# Altium PCB RS_485_MySensor.PcbDoc
Units mil, origin at the board's own origin, x right, y up, seen from the top; angles counter-clockwise.
Board outline 2845 x 1811.02 mil, 2 copper layers (Top Layer, Bottom Layer); 42 components, 39 nets, 157 pads, 49 vias.
Unrouted connection lines stored in the file: 2.
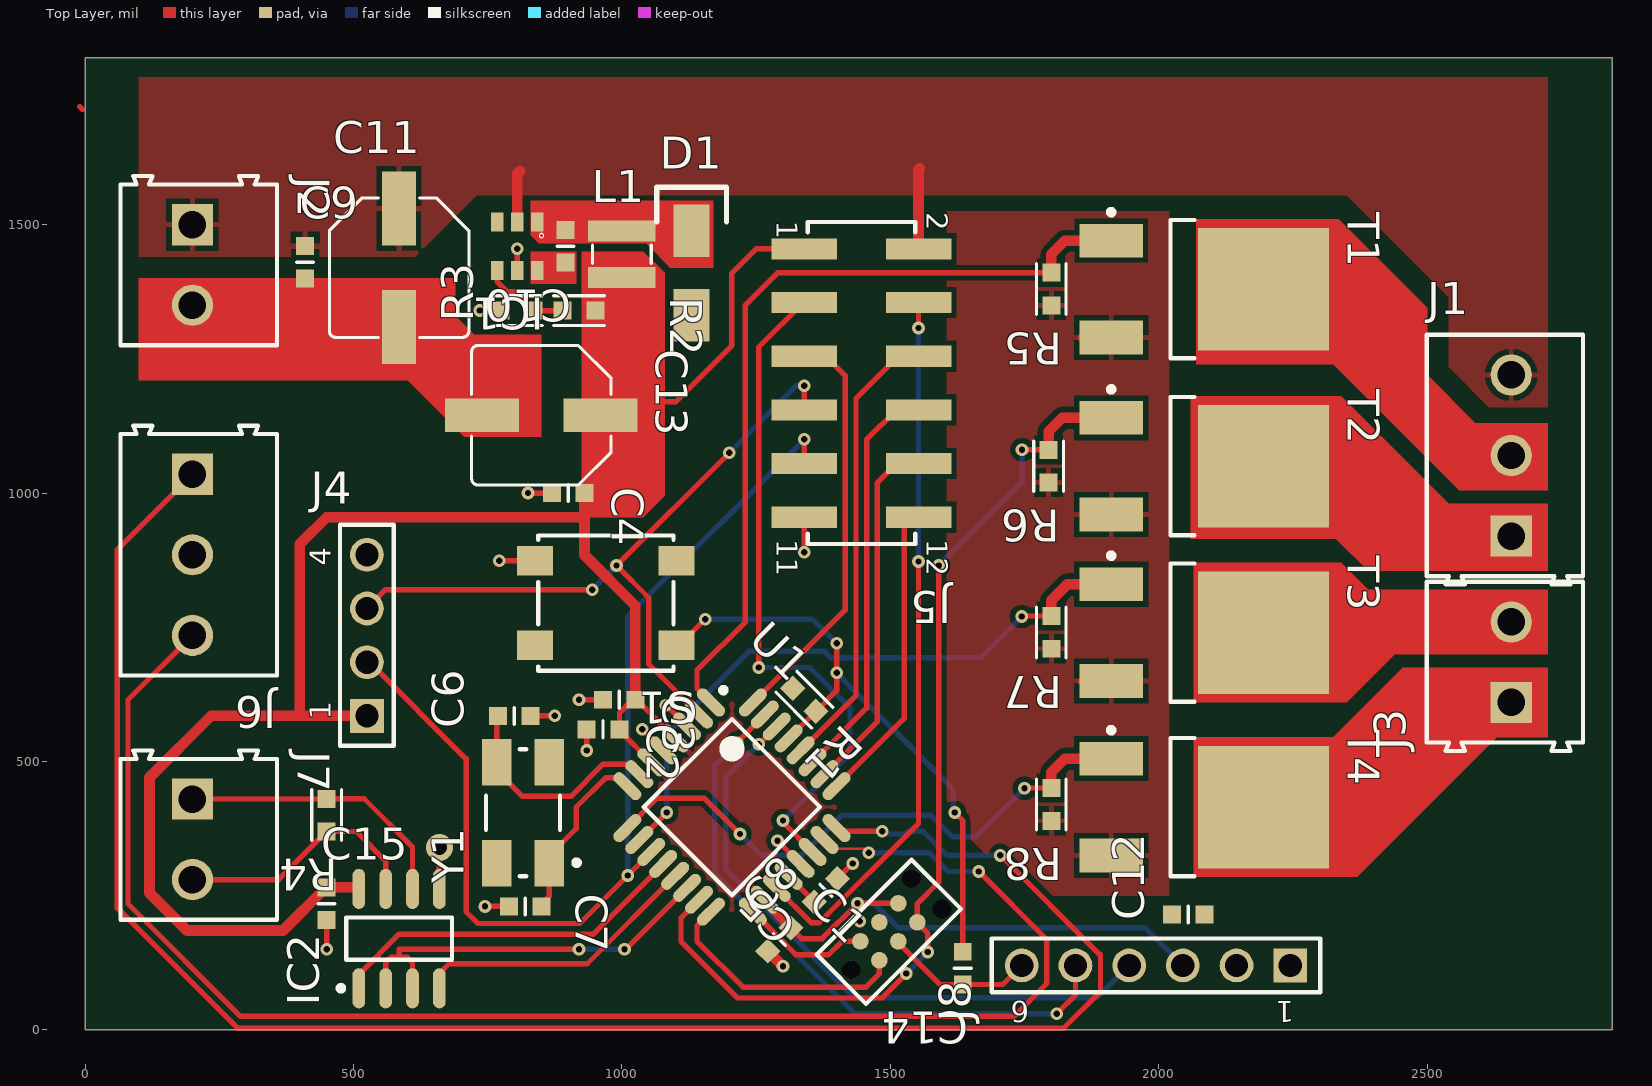
[diagram p0: Top Layer view]
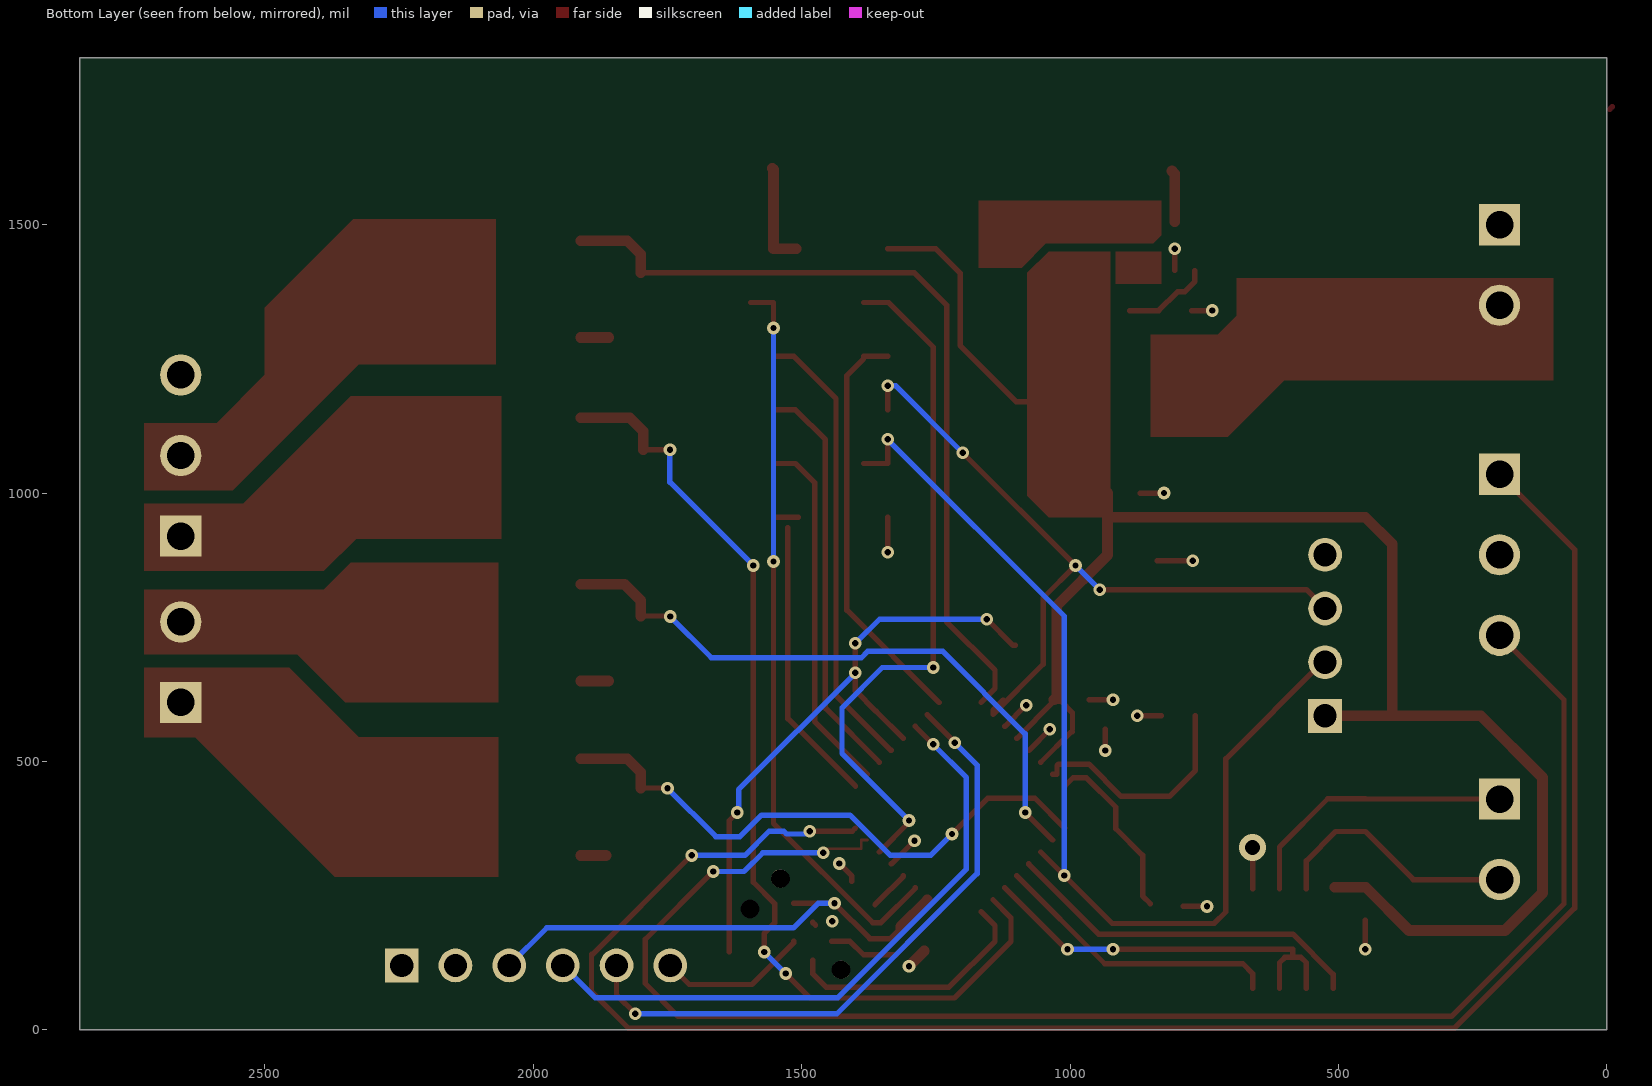
[diagram p1: Bottom Layer view, seen from below]
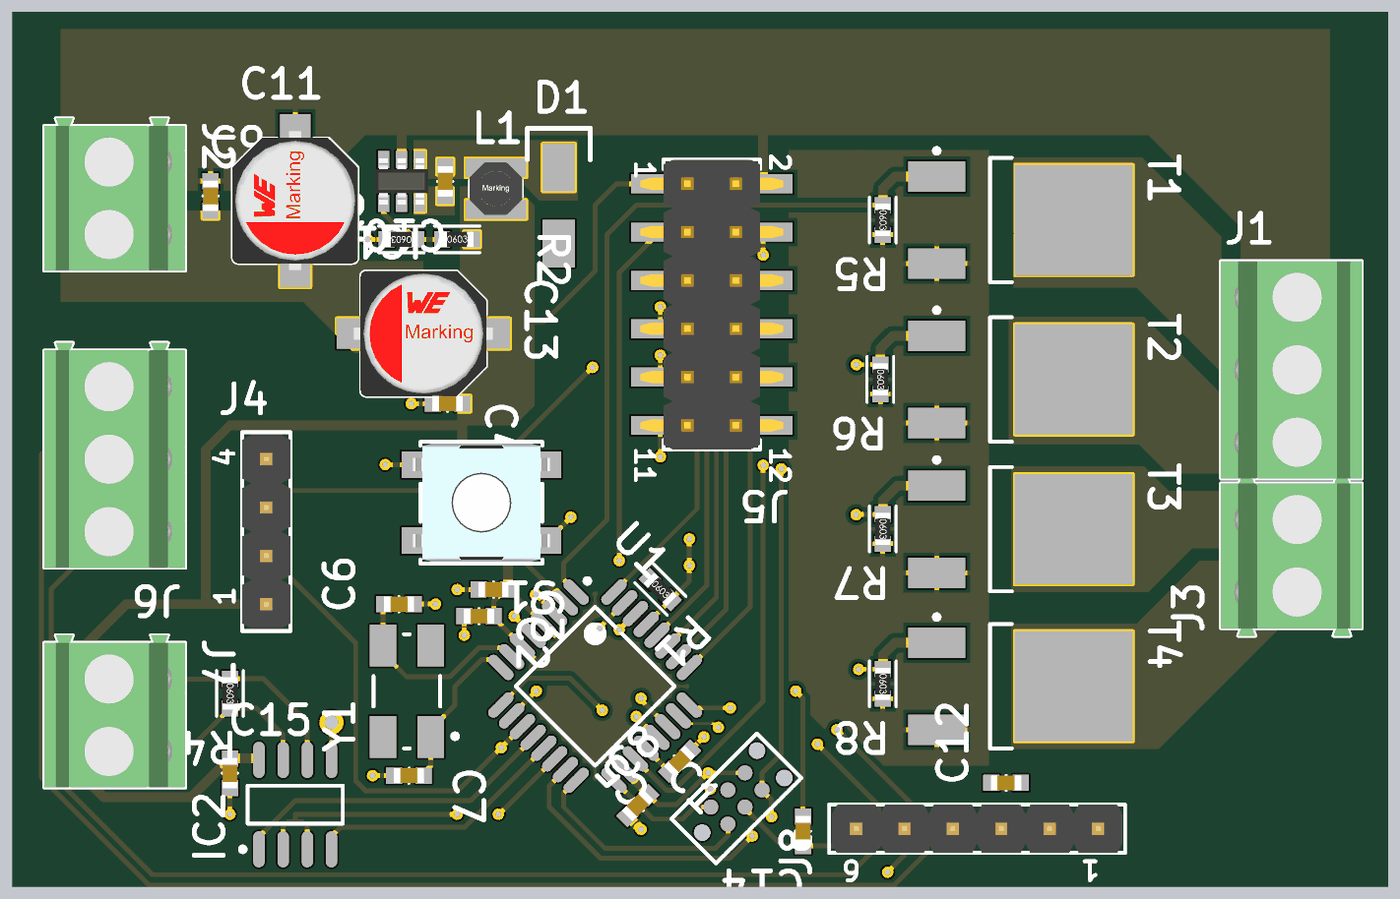
[diagram p2: 3D render of the assembled board from above, using the file's embedded part models]

## Layer stack, top to bottom
Top Solder: solder mask 0.4, Solder Resist, Dk 3.5
Top Layer: signal copper 1.4
Dielectric 1: dielectric 12.6, FR-4, Dk 4.8
Bottom Layer: signal copper 1.4
Bottom Solder: solder mask 0.4, Solder Resist, Dk 3.5

## Board outline
0,0 0,1811.02 2845,1811.02 2845,0

## Design rules (kind name [scope] priority, off if disabled: settings)
Clearance [All] p1: gap=10 ignorepadtopadclearanceinfootprint=FALSE except(0: Arc-Hole Track-Hole SMDPad-Hole THPad-Hole Via-Hole Fill-Hole Poly-Hole Region-Hole Text-Hole)
PolygonConnect [All] p1: connectstyle=Relief reliefconductorwidth=10 reliefentries=4 polygonreliefangle="90 Angle" airgapwidth=10
RoutingVias [All] p1: holewidth=28 width=50 viastyle="Through Hole" minholewidth=28 minwidth=50 maxholewidth=28 maxwidth=50
SolderMaskExpansion [All] p1: expansion=4
Width [All] p1: maxlimit=1000 minlimit=5 preferedwidth=10 minimp=50.000000 maximp=50.000000 favimp=50.000000
30 further rules are at their usual default settings.

## Classes and differential pairs
component class RS485_RGB_Atmega328: C1 C2 C3 C4 C5 C6 C7 C8 C14 J8 R1 S1 SW1 U1 Y1
component class RS485_RGB_Power: C9 C10 C11 C12 C13 C15 D1 IC1 IC2 L1 R2 R3 R5 R6 R7 R8 R? T1 T2 T3 T4
component class RS485_RGB_Connector: J4 J5 J6 R4

## Components (designator, comment, footprint, x,y, rotation, side; value= is the part's Value field where it differs from the comment)
C1 "4.7µF" SMD-0603C 1293.42,168.42 r315 top
C2 "1µF" SMD-0603C 965,560 r270 top
C3 "0.10µF" SMD-0603C 995,615 r270 top
C4 "0.10µF" SMD-0603C 900,1000 r270 top
C5 "0.10µF" SMD-0603C 1380,260 r135 top
C6 "22pF" SMD-0603C 799.49,585 r90 top
C7 "22pF" SMD-0603C 820,230 r270 top
C8 "ICSP" TC2030-MCP-NL 1426.61,111.97 r45 top
C9 "0.10µF" SMD-0603C 410,1430 r0 top
C10 "0.022µF" SMD-0603C 895,1460 r180 top
C11 "865080543009" WCAP-ASLI_6.3x5.5 585,1420 r90 top
C12 "22µF" SMD-0603C 2055,215 r90 top
C13 "865080543009" WCAP-ASLI_6.3x5.5 850,1145 r0 top
C14 "0.10µF" SMD-0603C 1635,115 r180 top
C15 "0.10µF" SMD-0603C 450,235 r0 top
D1 "B240A" B240A 1130,1410 r90 top
IC1 "ACT4088" SOT23-6 805,1460 r180 top
IC2 "MAX485" D008_L 585,170 r90 top
J1 "691214310003" 691214310003 2645,1070 r90 top
J2 "691214310002" 691214310002 211.81,1425 r270 top
J3 "691214310002" 691214310002 2645,685 r90 top
J4 "2.54 mm_THT_Vertical_4 pin" 61300411121 525,735 r90 top
J5 "2.54 mm_SMD_Vertical_12 pin" 61001221121 1446.3,1205 r270 top
J6 "691214310003" 691214310003 211.81,885 r270 top
J7 "691214310002" 691214310002 211.81,355 r270 top
J8 "2.54 mm_THT_Vertical_6 pin" 61300611121 1995,120 r180 top
L1 "744029004" WE-TPC_2813 1000,1445 r0 top
R1 "1k" SMD-0603-RES 1340,615 r225 top
R2 "47k" SMD-0603-RES 920,1340 r270 top
R3 "10k" SMD-0603-RES 804.49,1340 r90 top
R4 "120" SMD-0603-RES 450,400 r180 top
R5 "10k" SMD-0603-RES 1800,1380 r180 top
R6 "10k" SMD-0603-RES 1795,1050 r180 top
R7 "10k" SMD-0603-RES 1800,740.51 r180 top
R8 "10k" SMD-0603-RES 1800,420 r180 top
S1 "430453025836" 430453025836 970,795 r180 top
T1 "IRLR7833" ONSC-DPAK-3-369C-01_V 2084.76,1380 r0 top
T2 "IRLR7833" ONSC-DPAK-3-369C-01_V 2084.76,1050 r0 top
T3 "IRLR7833" ONSC-DPAK-3-369C-01_V 2084.76,740 r0 top
T4 "IRLR7833" ONSC-DPAK-3-369C-01_V 2084.76,415 r0 top
U1 "ATmega328-AU" 32A_N 1205,415 r315 top
Y1 "2SMX" 2SMX 815.79,404.49 r90 top

## Footprints (in the part's own frame and the unit in brackets; to place one, negate y for a bottom-side part, rotate by r counter-clockwise, add the part's x,y. Pads: shape width x height; smd on the part's side, far side on the other; paste and mask are expansions set on the pad)
2SMX [mm] "Surface Mount Quartz Crystal; Body 6.0 x 3.5 mm (LxW)"
  rect 2.2x1.4 smd: 1(-2.4,-1.25) 2(2.4,-1.25) 3(2.4,1.25) 4(-2.4,1.25)
  silkscreen extent -3,-2.66 3,1.75
32A_N [mm] "Thin QFP, 32-Leads, Body 7x7mm, Pitch 0.8mm, IPC Medium Density"
  oval 1.65x0.55 smd: 1(-4.2,2.8) 2(-4.2,2) 3(-4.2,1.2) 4(-4.2,0.4) 5(-4.2,-0.4) 6(-4.2,-1.2) 7(-4.2,-2) 8(-4.2,-2.8) 17(4.2,-2.8) 18(4.2,-2) 19(4.2,-1.2) 20(4.2,-0.4) 21(4.2,0.4) 22(4.2,1.2) 23(4.2,2) 24(4.2,2.8)
  oval 0.55x1.65 smd: 9(-2.8,-4.2) 10(-2,-4.2) 11(-1.2,-4.2) 12(-0.4,-4.2) 13(0.4,-4.2) 14(1.2,-4.2) 15(2,-4.2) 16(2.8,-4.2) 25(2.8,4.2) 26(2,4.2) 27(1.2,4.2) 28(0.4,4.2) 29(-0.4,4.2) 30(-1.2,4.2) 31(-2,4.2) 32(-2.8,4.2)
  silkscreen extent -4.32,-2.95 2.95,3.75, body extent -3.5,-3.5 3.5,3.5, height 1.2
61001221121 [mm] "Pin Header, pitch 2.54 mm, SMD, Vertical, dual row, 12p"
  rect 1x3.1 smd: 1(-6.35,-2.7) 2(-6.35,2.7) 3(-3.81,-2.7) 4(-3.81,2.7) 5(-1.27,-2.7) 6(-1.27,2.7) 7(1.27,-2.7) 8(1.27,2.7) 9(3.81,-2.7) 10(3.81,2.7) 11(6.35,-2.7) 12(6.35,2.7)
  silkscreen extent -7.62,-2.54 7.62,2.54, body extent -7.62,-3.75 7.62,3.75, height 9.62
61300411121 [mm] "Pin Header, pitch 2.54 mm, THT, Vertical, single row, 4p"
  rect 1.6x1.6 hole 1.1: 1(-3.81,0)
  round 1.6 hole 1.1: 2(-1.27,0) 3(1.27,0) 4(3.81,0)
  silkscreen extent -5.23,-1.27 5.23,1.27, body extent -5.08,-1.27 5.08,1.27, height 8.57
61300611121 [mm] "Pin Header, pitch 2.54 mm, THT, Vertical, single row, 6p"
  rect 1.6x1.6 hole 1.1: 1(-6.35,0)
  round 1.6 hole 1.1: 2(-3.81,0) 3(-1.27,0) 4(1.27,0) 5(3.81,0) 6(6.35,0)
  silkscreen extent -7.77,-1.27 7.77,1.27, body extent -7.62,-1.27 7.62,1.27, height 8.57
430453025836 [mm] "SMD Tact Switch, body 6x6mm"
  rect 1.7x1.4 smd: 1(-3.35,2) 2(3.35,2) 3(-3.35,-2) 4(3.35,-2)
  silkscreen extent -3.2,-3.2 3.2,3.2, body extent -3.6,-3.1 3.6,3.1, height 2.5
691214310002 [mm] "3,81mm - Horizontal wire entry - Rising cage clamp - 02p"
  rect 1.95x1.95 hole 1.3: 1(-1.905,-0.3)
  round 1.95 hole 1.3: 2(1.905,-0.3)
  silkscreen extent -4.2,-3.7 3.8,3.7, body extent -4.21,-3.7 3.81,3.7, height 8.55
691214310003 [mm] "3,81mm - Horizontal wire entry - Rising cage clamp - 03p"
  rect 1.95x1.95 hole 1.3: 1(-3.81,-0.3)
  round 1.95 hole 1.3: 2(0,-0.3) 3(3.81,-0.3)
  silkscreen extent -6.11,-3.7 5.71,3.7, body extent -6.12,-3.7 5.71,3.7, height 8.55
B240A [mm]
  rect 2.5x1.7 smd: A(-2,0) K(2,0)
  silkscreen extent 2.41,-1.65 4.06,1.65
D008_L [mm] "8-Pin Small Outline Integrated Circuit 1.27 mm Pitch, IPC High Density"
  oval 1.9x0.6 smd: 1(-2.35,1.905) 2(-2.35,0.635) 3(-2.35,-0.635) 4(-2.35,-1.905) 5(2.35,-1.905) 6(2.35,-0.635) 7(2.35,0.635) 8(2.35,1.905)
  silkscreen extent -2.47,-2.5 1,2.88, body extent -1.95,-2.45 1.95,2.45, height 1.75
ONSC-DPAK-3-369C-01_V [mm] "DPAK, 3-Leads, Body 6.54x6.095mm, Pitch 2.29mm"
  rect 3x1.6 smd: 1(-4.4,2.29) 3(-4.4,-2.29)
  rect 6.2x5.8 smd: 4(2.8,0)
  silkscreen extent -4.52,-3.27 -0.45,3.76, body extent -1.6,-3.27 4.49,3.27, height 2.38
SMD-0603-RES [mm]
  rect 0.85x0.85 smd: 1(0,0.775) 2(0,-0.775)
  silkscreen extent -0.7,-1.2 0.7,1.2, body extent -0.4,-0.85 0.4,0.85, height 0.56
SMD-0603C [mm]
  rect 0.85x0.85 smd: 1(0,0.775) 2(0,-0.775)
  silkscreen extent -0.4,0 0.4,0, body extent -0.4,-0.8 0.4,0.8, height 0.9
SOT23-6 [mm]
  rect 0.6x0.9 smd: 1(-0.95,-1.15) 2(0,-1.15) 3(0.95,-1.15) 4(0.95,1.15) 5(0,1.15) 6(-0.95,1.15)
  silkscreen extent -1.25,-0.6 -1.05,-0.4, body extent -1.4,-1.21 1.4,1.21, height 1.09
TC2030-MCP-NL [mil]
  round 31 smd: 1(50,-25) 2(50,25) 3(100,-25) 4(100,25) 5(150,-25) 6(150,25)
  round 34 hole 35 unplated: A(0,0) B(200,40) C(200,-40)
  silkscreen extent -25,-65 225,65
WCAP-ASLI_6.3x5.5 [mm] "Aluminium Electrolytic V-Chip SMT Capacitors, §¶6.3x5.5mm"
  rect 3.5x1.6 smd: 1(2.8,0) 2(-2.8,0)
  silkscreen extent -3.3,-3.3 3.3,3.3, body extent -3.65,-3.3 3.65,3.3, height 5.5
WE-TPC_2813 [mm] "Power Inductor, SMD, 2-Leads, body 2.8x2.8mm"
  rect 3.2x1 smd: 1(0,1.1) 2(0,-1.1)
  silkscreen extent -1.39,-0.43 1.39,0.43, body extent -1.39,-1.39 1.39,1.39, height 1.2

## Part data
C1: library part GRM188C80G475KE19D, "CAP CER 4.7UF 4V X6S 0603"
C2: library part GRM185C81A105KE36D, "CAP CER 1UF 10V X6S 0603"
C3 C4 C5 C9 C14 C15: library part GCJ188R72A104KA01D, "CAP CER 0.1UF 100V X7R 0603"
C6 C7: library part GCM1885C1H220JA16D, "CAP CER 22PF 50V NP0 0603"
C10: library part GCJ188R71H223KA01D, "CAP CER 0.022UF 50V X7R 0603"
C11 C13: "WCAP-ASLI Aluminum Electrolytic Capacitors, size ?6.3x5.5mm, 35V DC, 47uF"
C12: library part GRM186R60G226ME15D, "CAP CER 22UF 4V X5R 0603"
D1: "Shottkydiode"
J1 J6: "Serie 2143 - 3.81 mm Horizontal Cable Entry with Rising Cage Clamp WR-TBL, 3 pin"
J2 J3 J7: "Serie 2143 - 3.81 mm Horizontal Cable Entry with Rising Cage Clamp WR-TBL, 2 pin"
J4: library part 61300411121, "Pin Header WR-PHD, pitch 2.54 mm, THT, Vertical, single row, 4 pin"
J5: library part 61001221121, "Pin Header WR-PHD, pitch 2.54 mm, SMD, Vertical, dual row, 12 pin"
J8: library part 61300611121, "Pin Header WR-PHD, pitch 2.54 mm, THT, Vertical, single row, 6 pin"
L1: "WE-TPC SMD Shielded Tiny Power Inductor, size 2813, 1A, 170mO, 4.7uH"
R1: library part ERJ-3EKF1001V, "RES SMD 1K OHM 1% 1/10W 0603"
R2: library part ERJ-3EKF4702V, "RES SMD 47K OHM 1% 1/10W 0603"
R3 R5 R6 R7 R8: library part ERJ-3EKF1002V, "RES SMD 10K OHM 1% 1/10W 0603"
R4: library part ERJ-3EKF1200V, "RES SMD 120 OHM 1% 1/10W 0603"
S1: "6x6mm SMD J-Bend washable WS-TASV, height 2.5 mm, 360 gf"
T1 T2 T3 T4: "N-Channel MOSFET"
U1: "8-bit AVR Microcontroller, 32KB Flash, 1KB EEPROM, 2KB SRAM, 32-pin TQFP, Industrial Grade (-40°C to 85°C)"
Y1: "Surface Mount Quartz Crystal"

## Via types
v1: diameter 23.62, hole 11.81, Top Layer to Bottom Layer, 48 vias
v2: diameter 50, hole 28, Top Layer to Bottom Layer, 1 vias

## Nets (pads, with @x,y where several pads share a name; then routed paths per layer and width w, separated by ;. In a path a pad name is that pad's centre, name@x,y a point inside that pad or via, vN(x,y) a via of type N, cw(c..) or ccw(c..) an arc to the next point about the centre after c; other vN are vias at no path point)
+5V: C1.1 C2.1 C3.1 C4.1 C8.6 C12.1 C13.1 C15.1 IC2.8 J4.1 J5.1 J8.3 L1.2 R1.2 R2.1 U1.4 U1.6 U1.18 | length 4180.1
  Top Layer w10: IC2.8@507.01,265.51 IC2.8 ; C13.1@995.24,1170 1100,1170 1205,1275 1205,1410 1250,1455 J5.1 ; C2.1@995.51,555 998.19,555 U1.6 ; C2.1 995.51,590.51 1017.27,612.27 C3.1@1030,612.27 ; C3.1@1030,615 C3.1@1030,612.27 ; U1.4 C3.1@1030,612.27 ; C1.1 1335,170 1373.16,170 v1(1438.87,235.71) C8.6
  Top Layer w20: IC2.8@507.01,265.51 C15.1 449.27,265.51 368.76,185 190,185 120,255 120,470 235,585 400,585 ; J4.1 400,585 ; C4.1 930.51,955.51 ; C3.1@1030,615 1025,620 1025,790 930.51,884.49 930.51,955.51 ; U1.18 1266.25,241.45 1315,192.7 C1.1 ; 400,585 400,905 450,955 930,955 930.51,955.51
  Bottom Layer w10: v1(1438.87,235.71) 1469.54,235.71 1515.25,190 1975,190 J8.3
GND: C1.2 C2.2 C3.2 C4.2 C5.2 C6.2 C7.2 C8.4 C9.2 C11.2 C12.2 C13.2 C15.2 D1.A IC1.5 IC2.5 J2.2 J4.4 J5.11 J6.2 J8.1 J8.2 R3.1 R5.1 R6.1 R7.1 R8.1 S1.4 T1.3 T2.3 T3.3 T4.3 U1.3 U1.5 U1.21 | length 984.6
  Top Layer w10: v1(450,150) C15.2 ; IC2.5 v2(660,340) ; v1(735,1340) R3.1 ; v1@740,230 v1(745,230) C7.2 ; v1(771.26,873.74) S1.4 ; IC1.5 v1(805,1455) ; v1(825,1000) C4.2 ; C6.2 v1(875,585) v1@879.84,585 ; v1(920,615) C3.2 ; v1(934.49,520.51) C2.2 ; v1(1037.73,560) U1.5 ; v1(1081.81,605) U1.3 ; v1(1290,352.27) U1.21 U1.21@1333.7,309.21 ; v1(1340,890) J5.11 ; C5.2@1406.58,276.58 1406.58,286.58 v1(1430,310) ; C8.4@1474.29,195 C8.4
  Top Layer w20: C1.2 v1(1300,118.7) ; T1.3@1859.65,1289.84 T1.3 ; T3.3@1860.16,649.84 T3.3 ; T4.3@1864.65,324.84 T4.3
  other v1: 1443.39,202.31
NetC5_1: C5.1 U1.20 | length 75.3
  Top Layer w10: U1.20 1310.79,286.06 C5.1 C5.1@1363.42,233.42
NetC6_1: C6.1 U1.7 Y1.3 | length 429.6
  Top Layer w10: C6.1@766.57,585 Y1.3 766.57,483.43 815,435 905,435 965.11,495.11 1021.55,495.11 1024.38,492.28 1024.38,476.25 U1.7
NetC7_1: C7.1 U1.8 Y1.1 | length 331.3
  Top Layer w10: C7.1@850.51,235 865,249.49 Y1.1 865,325 915,375 915,415 970,470 994.1,470 U1.8
NetC8_1: C8.1 U1.16 | length 476.4
  Top Layer w10: U1.16 1140,194.1 1140,165 1225.53,79.47 1454.47,79.47 1479.64,104.64 C8.1
NetC8_2: C8.2 U1.17 | length 243.9
  Top Layer w10: U1.17 1324.1,140 1385,140 1410,165 C8.2
NetC8_3: C8.3 C14.1 J8.6 | length 279.8
  Top Layer w10: C8.3 1515,162.08 1592.6,84.49 C14.1 1709.49,84.49 J8.6
NetC8_5: C8.5 R6.2 T2.1 U1.15 | length 1865.9
  Top Layer w10: U1.15 1110,208.64 1110,165 1215.53,59.47 1484.47,59.47 v1(1530,105) ; v1(1570,145) 1570,179.64 1550.36,199.29 1550.36,235.36 1590,275 v1(1590,865) ; v1(1745.51,1080.51) R6.2
  Top Layer w20: R6.2 1795,1115 1820.16,1140.16 T2.1
  Bottom Layer w10: v1(1530,105) v1(1570,145) ; v1(1590,865) 1745.51,1020.51 v1(1745.51,1080.51)
NetC10_1: C10.1 IC1.6
NetC10_2: C10.2 D1.K IC1.1 L1.1
NetC14_2: C14.2 R1.1 S1.1 U1.29 | length 1162.3
  Top Layer w10: S1.1 1106.26,716.26 v1(1155,765) ; U1.29 1361.15,593.42 R1.1 1400,631.85 v1(1400,665) v1(1400,720) ; v1(1620,405) 1635,390 C14.2
  Bottom Layer w10: v1(1155,765) 1355,765 v1@1395,725 ; v1(1400,665) 1617.5,447.5 v1@1617.5,402.5
NetIC1_4: IC1.4 R2.2 R3.2 | length 164.9
  Top Layer w10: IC1.4 767.6,1394.13 786.73,1375 800,1375 R3.2 R2.2
NetIC2_1: IC2.1 U1.12 | length 678.7
  Top Layer w10: IC2.1 510,103.28 584.98,178.27 947.1,178.27 1076.94,308.1 U1.12
NetIC2_2: IC2.2 IC2.3 U1.14 | length 752.3
  Top Layer w10: IC2.2 560,125 570,135 585,135 ; IC2.3 610,125 600,135 585,135 ; v1(920,150) 585,150 585,135 ; v1(1005,150) 1006.81,150 U1.14
  Bottom Layer w10: v1(920,150) v1(1005,150)
NetIC2_4: IC2.4 U1.13 | length 542.1
  Top Layer w10: IC2.4 660,105 678.19,123.19 935.46,123.19 U1.13
NetIC2_6: IC2.6 J7.1 R4.2 | length 525.5
  Top Layer w10: J7.1 449.49,430 R4.2 520,430.51 610,340.51 IC2.6
NetIC2_7: IC2.7 J7.2 R4.1 | length 472.1
  Top Layer w10: J7.2 360.51,280 R4.1 505.51,369.49 560,315 IC2.7
NetJ1_1: J1.1 T2.4
NetJ1_2: J1.2 T1.4 | length 5
  Top Layer w10: T1.4 T1.4@2200,1380
NetJ3_1: J3.1 T4.4
NetJ3_2: J3.2 T3.4
NetJ4_2: J4.2 J5.9 U1.11 | length 1995.9
  Top Layer w10: J4.2 530,685 710,505 710,220 731.73,198.27 921.45,198.27 v1(1010.92,287.73) U1.11 ; v1(1340,1100) J5.9 J5.9@1385,1055
  Bottom Layer w10: v1@1008.19,285 v1(1010.92,287.73) 1010.92,770.92 v1(1340,1100)
NetJ4_3: J4.3 J5.7 U1.2 | length 1407.7
  Top Layer w10: J4.3 560,820 v1(945,820) ; 1124.89,614.49 1143.75,595.62 U1.2 1050,681.36 1050,805 v1(990,865) v1(1200,1075) ; J5.7 v1(1340,1200)
  Bottom Layer w10: v1(945,820) v1(990,865) ; v1(1200,1075) 1325,1200 v1(1340,1200)
NetJ5_3: J5.3 U1.22 | length 1305.6
  Top Layer w10: v1(1255,675) 1255,1271.92 1338.08,1355 J5.3 J5.3@1385,1355 ; v1(1300,390) 1300,386.81 U1.22
  Bottom Layer w10: v1(1255,675) 1350,675 1425,600 1425,515 v1(1300,390)
NetJ5_4: J5.4 U1.19 | length 1381
  Top Layer w10: U1.19 1288.52,263.46 1352.21,199.76 1367.68,199.76 1552.6,384.68 v1(1552.6,872.4) ; v1(1552.6,1307.4) J5.4 J5.4@1595,1355
  Bottom Layer w10: v1(1552.6,872.4) v1(1552.6,1307.4)
NetJ5_5: J5.5 U1.32 | length 774.2
  Top Layer w10: U1.32 1416.02,781.92 1416.02,1218.98 1385,1250 1385,1255 J5.5
NetJ5_6: J5.6 U1.28 | length 847.6
  Top Layer w10: U1.28 1333.81,520.79 1436.02,623 1436.02,1176.02 1515,1255 J5.6
NetJ5_8: J5.8 U1.27 | length 762.2
  Top Layer w10: U1.27 1456.02,599.21 1456.02,1099.45 1511.57,1155 J5.8
NetJ5_10: J5.10 U1.26 | length 675.3
  Top Layer w10: U1.26 1476.02,574.67 1476.02,1019.45 1511.57,1055 J5.10
NetJ5_12: J5.12 U1.25 | length 580
  Top Layer w10: U1.25 1525.79,579.89 J5.12@1525.79,935.79 ; J5.12@1506.57,955 J5.12
NetJ6_1: J6.1 U1.24 | length 3481.1
  Top Layer w10: J6.1 60,895 60,226.72 283.53,3.19 1823.19,3.19 1891.5,71.5 1891.5,140.76 1890,140.76 1705.76,325 v1(1705,325) ; U1.24 1405.9,370 v1(1485,370)
  Bottom Layer w10: v1(1485,370) 1490,365 1528.28,365 1533.28,370 1560.76,370 1605.76,325 v1(1705,325)
NetJ6_3: J6.3 U1.23 | length 2955.8
  Top Layer w5: U1.23 1389.15,353.75 1389.15,337.39 1452.61,337.39 v1(1460,330)
  Top Layer w10: J6.3 80,615 80,235 289.92,25.08 1730.08,25.08 1791.5,86.5 1791.5,168.5 v1(1665,295)
  Bottom Layer w10: v1(1460,330) 1572.47,330 1607.47,295 v1(1665,295)
NetJ8_4: J8.4 U1.30 | length 1181.2
  Top Layer w10: v1(1255,531.81) U1.30
  Bottom Layer w10: v1(1255,531.81) 1193.19,470 1193.19,299.43 1432.62,60 1885,60 J8.4
NetJ8_5: J8.5 U1.31 | length 1184.5
  Top Layer w10: v1(1215,535) 1215,536.36 U1.31 ; v1(1810,30) 1845,65 J8.5
  Bottom Layer w10: v1(1215,535) 1173.19,493.19 1173.19,291.14 1434.33,30 v1(1810,30)
NetR5_2: R5.2 T1.1 U1.1 | length 1539.7
  Top Layer w10: U1.1 1140,635.9 1140,670 1230,760 1230,1350 1290.51,1410.51 R5.2
  Top Layer w20: R5.2 1800,1445 1825.16,1470.16 T1.1
NetR7_2: R7.2 T3.1 U1.10 | length 1187.6
  Top Layer w10: U1.10 v1(1083.64,405) ; v1@1746.02,771.02 R7.2
  Top Layer w20: R7.2 1800,800 1830.16,830.16 T3.1
  Bottom Layer w10: v1(1083.64,405) 1083.64,551.56 1237.08,705 1377.08,705 1388.89,693.19 1668.19,693.19 v1(1745,770)
NetR8_2: R8.2 T4.1 U1.9 | length 1097.7
  Top Layer w10: U1.9 1065.91,431.81 1153.19,431.81 v1(1220,365) ; v1@1745.51,450.51 R8.2
  Top Layer w20: R8.2 1800,480 1825.16,505.16 T4.1
  Bottom Layer w10: v1(1220,365) 1259.54,325.46 1335.46,325.46 1410,400 1575,400 1615,360 1660,360 v1(1750,450)
VCC: C9.1 C11.1 IC1.2 J1.3 J2.1 J5.2 | length 290.4
  Top Layer w20: IC1.2 805,1595 810,1600 ; J5.2@1510,1455 J5.2 1552.6,1602.6 1555,1605
pads on no net: C8.A C8.B C8.C IC1.3 S1.2 S1.3 Y1.2 Y1.4
copper on no net: | length 7.1
  Top Layer w10: -10,1720 -5,1715

## Polygon pours and split planes (outlines as drawn)
GND on Top Layer "Top Layer-GND" (solid, remove dead copper, pour order 2): 2020,1525 1605,1525 1605,900 1605,400 1755,250 2020,250
VCC on Top Layer "Top Layer-Vcc" (solid, remove dead copper, pour order 10): 100,1775 100,1440 615,1440 730,1555 2350,1555 2540,1365 2540,1235 2615,1160 2725,1160 2725,1775
+5V on Top Layer "Top Layer-+5V" (solid, remove dead copper, pour order 14): 1166.03,609.87 1167.05,610.9 1245,610.9 1245,608.85 1399.87,453.97 1399.87,376.03 1243.97,220.13 1166.03,220.13 1164.87,220.13 1005,380 1008.97,376.03 1010.13,376.03 1010.13,453.97 1166.03,609.87 1243.97,609.87

## Other copper
Top Layer:
  region net NetC10_1: 830,1450 915,1450 915,1390 830,1390
  region net +5V: 925,1450 925,955 1040,955 1080,995 1080,1410 1040,1450
  region net NetC10_2: 830,1545 830,1480 845,1465 1045,1465 1090,1420 1170,1420 1170,1545
  region net GND: 100,1400 690,1400 690,1330 725,1295 850,1295 850,1105 706.02,1105 601.02,1210 295,1210 100,1210
  region net NetJ3_1: 2065,545 2325,545 2455,675 2725,675 2725,545 2630,545 2370,285 2065,285
  region net NetJ3_2: 2065,870 2340,870 2390,820 2725,820 2725,700 2440,700 2350,610 2065,610
  region net NetJ1_1: 2060,1180 2340,1180 2540,980 2725,980 2725,855 2390,855 2330,915 2060,915
  region net NetJ1_2: 2070,1510 2335,1510 2500,1345 2500,1220 2590,1130 2725,1130 2725,1005 2560,1005 2325,1240 2070,1240

## Silkscreen, mask and mechanical layers (free items; w line width, h text height)
Mechanical 1:
  lines w10: 0,-20 0,1811.02 2845,1811.02 2845,-20 0,-20

## Text inside footprints (layer, text, board x,y; h text height)
J4: Top Overlay "1" at 458.07,577.52 h39.37 r90; Top Overlay "4" at 458.07,864.92 h39.37 r90
J5: Top Overlay "2" at 1568.35,1523.11 h39.37 r270; Top Overlay "1" at 1288.82,1507.36 h39.37 r270; Top Overlay "11" at 1288.82,914.45 h39.37 r270; Top Overlay "12" at 1568.35,914.45 h39.37 r270
J8: Top Overlay "1" at 2252.48,53.07 h39.37 r180; Top Overlay "6" at 1758.78,53.07 h39.37 r180